# Altium PCB PCB1.PcbDoc
Units mil, origin at the board's own origin, x right, y up, seen from the top; angles counter-clockwise.
Board outline 1735 x 2560 mil, 2 copper layers (Top Layer, Bottom Layer); 17 components, 8 nets, 44 pads, 0 vias.
Unrouted connection lines stored in the file: 1.
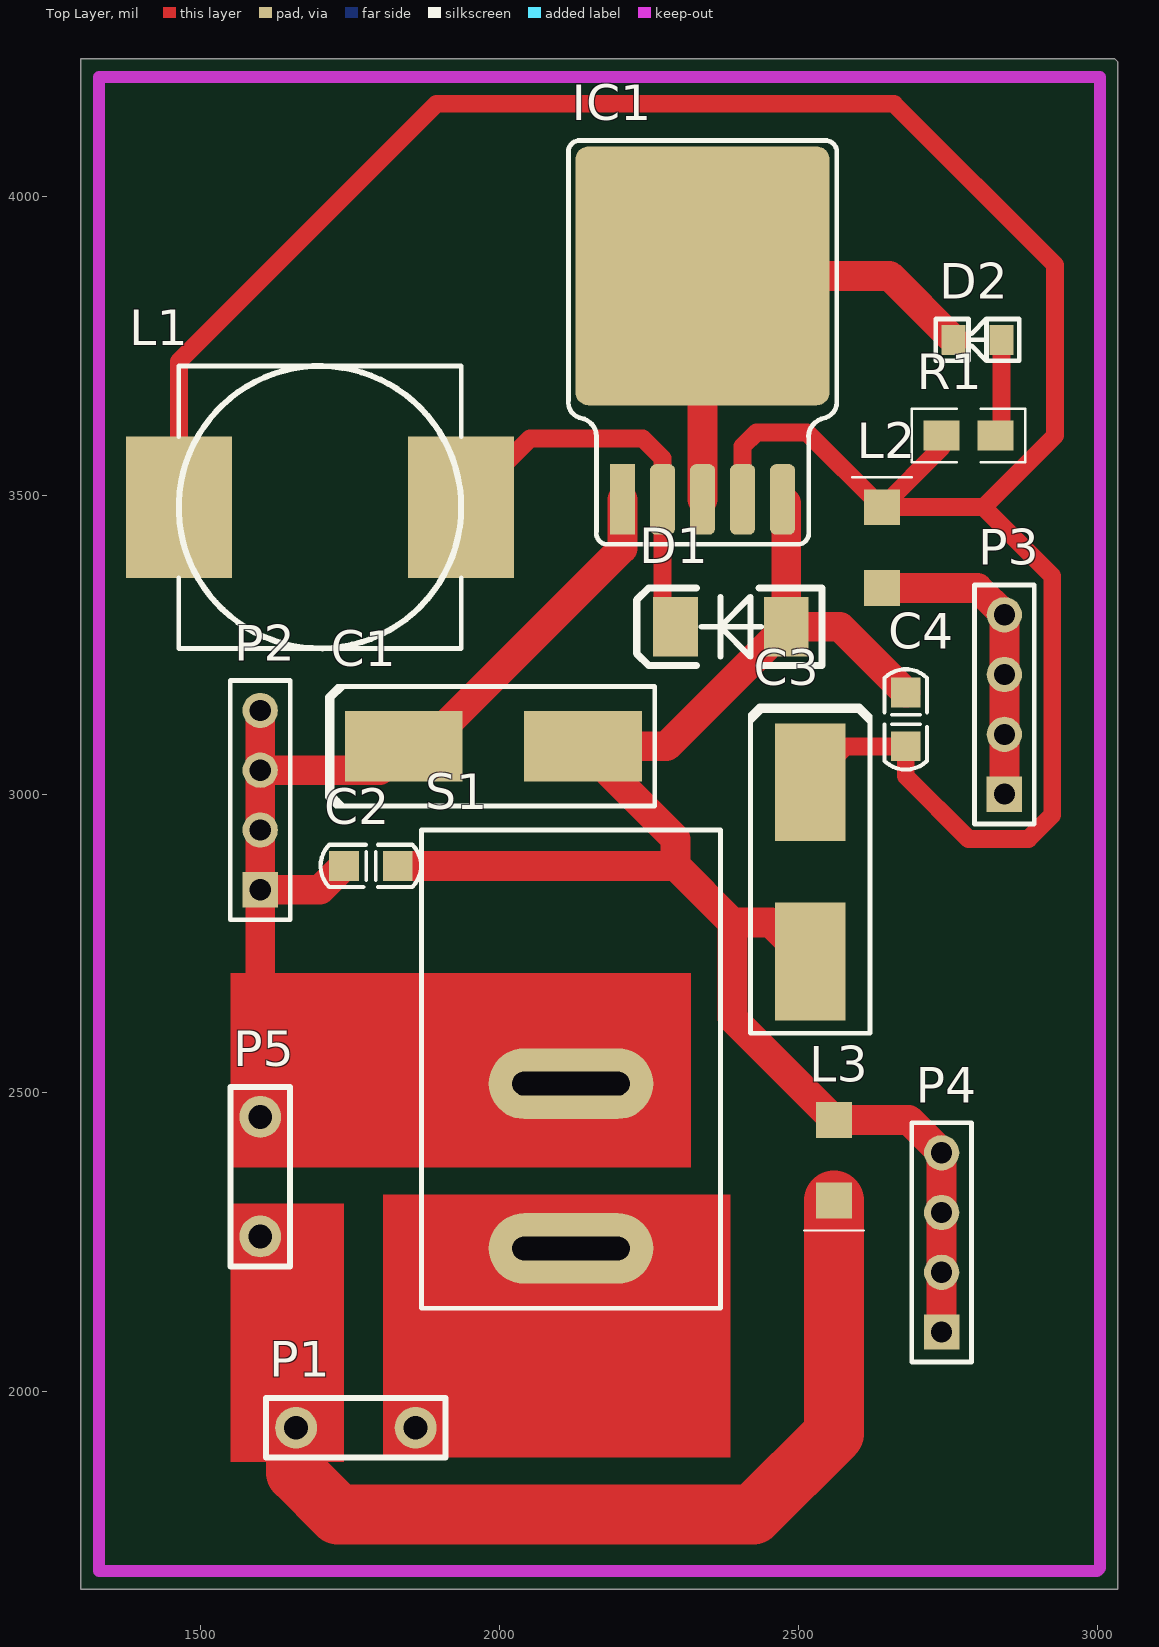
[diagram p0: Top Layer view]
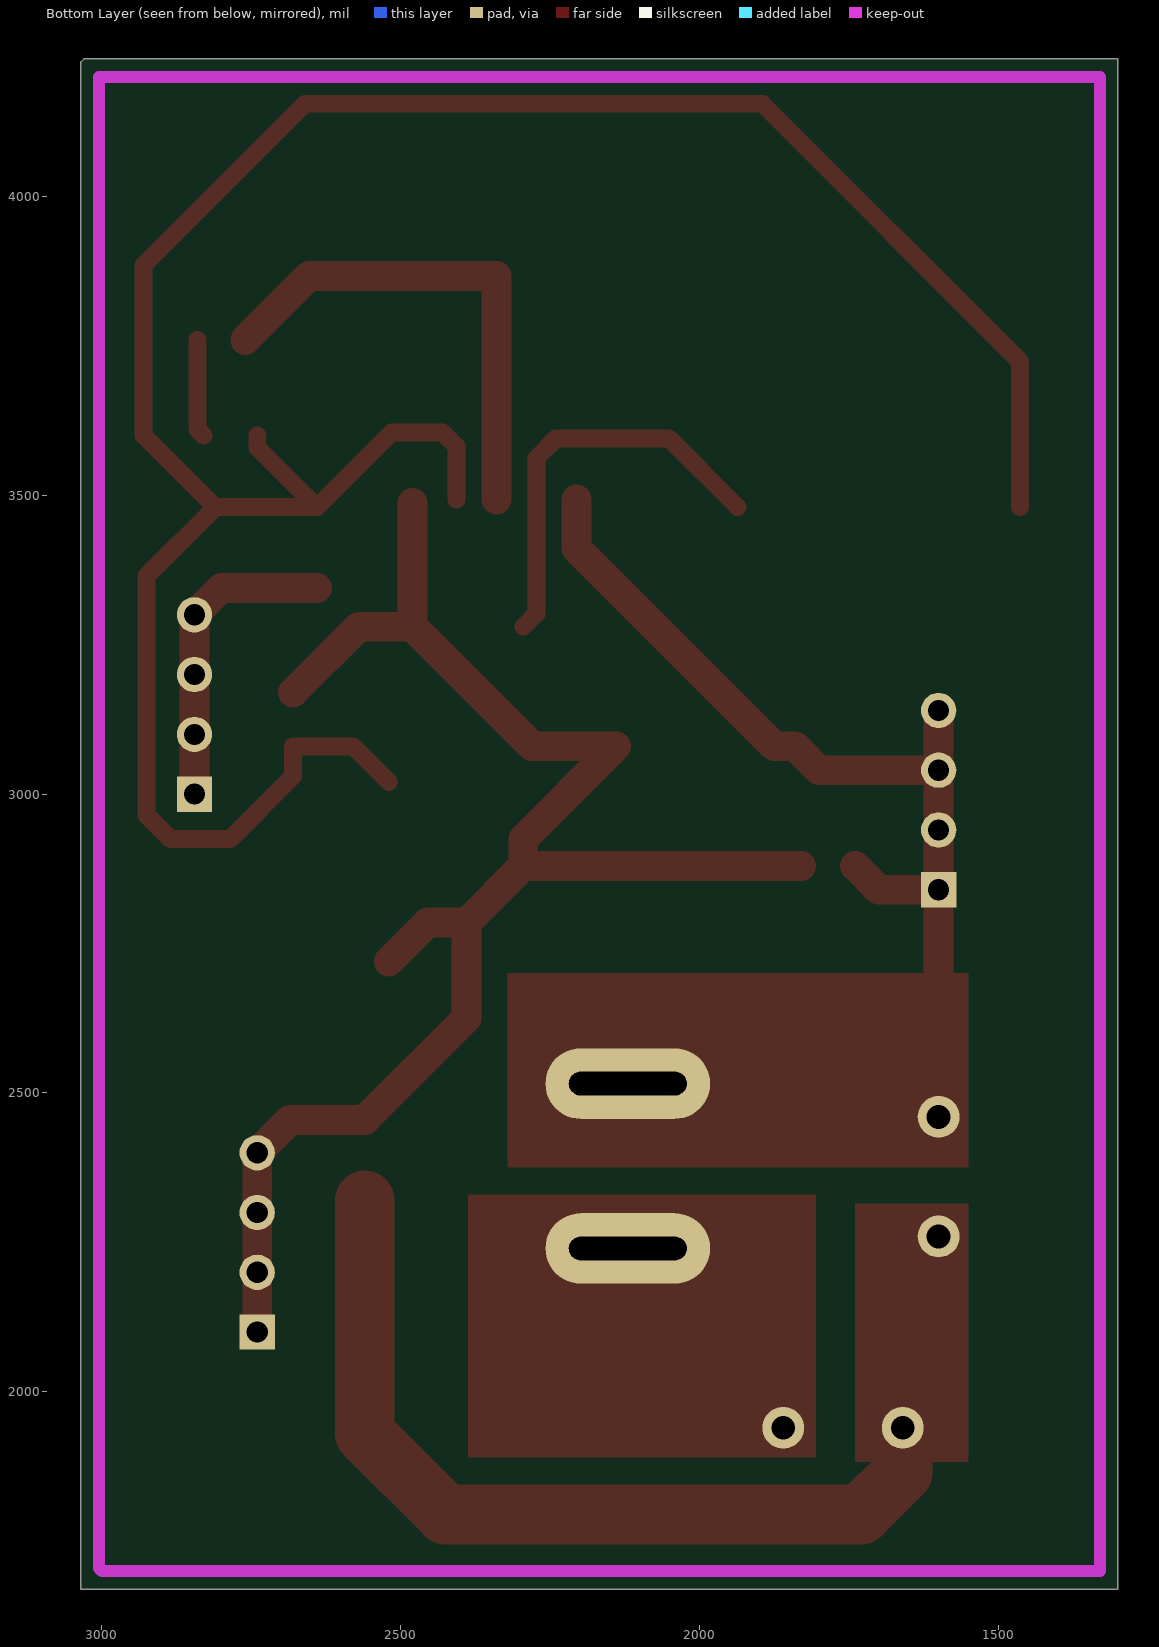
[diagram p1: Bottom Layer view, seen from below]

## Layer stack, top to bottom
Top Layer: signal copper 1.4
Dielectric: dielectric 12.6, FR-4, Dk 4.8
Bottom Layer: signal copper 1.4

## Board outline
1300,4230 1300,1670 3035,1670 3035,4225 3030,4230

## Design rules (kind name [scope] priority, off if disabled: settings)
Clearance [All] p1: gap=10
ComponentClearance [All] p1: gap=10 collisioncheckmode=3 verticalgap=10
PolygonConnect [All] p1: connectstyle=Relief reliefconductorwidth=10 reliefentries=4 polygonreliefangle="90 Angle"
RoutingVias [All] p1: holewidth=28 width=50 viastyle="Through Hole" minholewidth=28 minwidth=50 maxholewidth=28 maxwidth=50
SolderMaskExpansion [All] p1: expansion=4
TestPointUsage [All] p1: valid=0 allowmultiple=FALSE
Testpoint [All] p1: side=15 testpointundercomponent=TRUE minsize=40 maxsize=100 preferedsize=60 minholesize=0 maxholesize=40 preferedholesize=32 testpointgrid=1 style=1023 order=0123456789
Width [All] p1: maxlimit=100 minlimit=20 preferedwidth=30
18 further rules are at their usual default settings.

## Components (designator, comment, footprint, x,y, rotation, side; value= is the part's Value field where it differs from the comment)
C1 "470" ccc 1840,3080 r0 top
C2 "" C0805 1740,2880 r0 top
C3 "470" ccc 2520,3020 r270 top
C4 "" C0805 2680,3080 r90 top
D1 "D Zener" D1810 2480,3280 r180 top
D2 "LED2" D0805 2840,3760 r180 top
IC1 "LM2596-05" TO-263-5 2340,3680 r0 top
L1 "Inductor" L-12*12MM-S 1700,3480 r180 top
L2 "Inductor" L1206 2640,3480 r270 top
L3 "Inductor" L1206 2560,2320 r90 top
P1 "Header 2" SIP2-1 1860,1940 r180 top
P2 "Header 4" HDR1X4 1600,2840 r90 top
P3 "Header 4" HDR1X4 2845,3000 r90 top
P4 "Header 4" HDR1X4 2740,2100 r90 top
P5 "Header 2" SIP2-1 1600,2460 r270 top
R1 "Res2" R0805 2740,3600 r0 top
S1 "SW-SPST" PCBComponent_1 2120,2240 r90 top

## Footprints (in the part's own frame and the unit in brackets; to place one, negate y for a bottom-side part, rotate by r counter-clockwise, add the part's x,y. Pads: shape width x height; smd on the part's side, far side on the other; paste and mask are expansions set on the pad)
C0805 [mil]
  rect 50x50 smd: 1(0,0) 2(90,0)
  silkscreen extent -39,-36 129,36, body extent 6,-24 85,23, height 47
ccc [mm]
  rect 5x3 smd: 1(0,0) 2(7.62,0)
  silkscreen extent -3.25,-2.54 10.67,2.54
D0805 [mil]
  rect 40x50 smd: 1(0,0) 2(80,0)
  silkscreen extent -30,-35 110,35, body extent 0,-17 81,19, height 33
D1810 [mil]
  rect 75x100 smd: 1(0,0) 2(185,0)
  silkscreen extent -60,-65 250,65, body extent -18,-76 202,78, height 98
HDR1X4 [mm] "Connector; Header; 4 Position"
  rect 1.5x1.5 hole 0.9: 1(0,0)
  round 1.5 hole 0.9: 2(2.54,0) 3(5.08,0) 4(7.62,0)
  silkscreen extent -1.27,-1.27 8.89,1.27
L1206 [mil]
  rect 60x60 smd: 1(0,0) 2(135,0)
  silkscreen extent -50,-50 -50,50, body extent 5,-32 131,31, height 43
L-12*12MM-S [mm]
  rect 4.5x6 smd: 1(-6,0) 2(6,0)
  silkscreen extent -6,-6 6,6, body extent -6.05,-5.94 5.95,6.06, height 8
PCBComponent_1 [mm]
  oval 3x7 hole 1 slot 5 at 90 deg: 1(0,0) 2(7,0)
  silkscreen extent -2.54,-6.35 17.78,6.35
R0805 [mil]
  rect 60x50 smd: 1(0,0) 2(90,0)
  silkscreen extent -50,-45 140,45, body extent 6,-25 85,25, height 22
SIP2-1 [mil]
  round 70 hole 40: 1(0,0) 2(200,0)
  silkscreen extent -50,-50 250,50
TO-263-5 [mm]
  rect 1.07x3 smd: 1(-3.4,-4.75)
  rrect50% 1.07x3 smd: 2(-1.7,-4.75) 3(0,-4.75) 4(1.7,-4.75) 5(3.4,-4.75)
  rrect10% 10.8x11 smd: 3(0,4.75)
  silkscreen extent -5.7,-6.66 5.7,10.5, body extent -5.14,-4.8 5.09,9.55, height 4.48

## Part data
C1 C2 C3 C4: library part "Cap Pol2", "Polarized Capacitor (Axial)"
D1: "Zener Diode"
D2: "Typical RED, GREEN, YELLOW, AMBER GaAs LED"
P1 P5: "Header, 2-Pin"
P2 P3 P4: "Header, 4-Pin"
R1: "Resistor"
S1: "Single-Pole, Single-Throw Switch"

## Nets (pads, with @x,y where several pads share a name; then routed paths per layer and width w, separated by ;. In a path a pad name is that pad's centre, name@x,y a point inside that pad or via, vN(x,y) a via of type N, cw(c..) or ccw(c..) an arc to the next point about the centre after c; other vN are vias at no path point)
5V: L2.2 P3.1 P3.2 P3.3 P3.4 | length 523.6
  Top Layer w50: L2.2 2800,3345 P3.4 P3.1
DGND: C1.2 C2.2 C3.2 C4.2 D1.1 D2.2 IC1.3 IC1.5 L3.2 P4.1 P4.2 P4.3 P4.4 | length 3637.3
  Top Layer w50: C2.2 2295,2880 ; IC1.3@2340,3492.99 2340,3867.01 2652.99,3867.01 D2.2 ; IC1.5@2480,3486.85 D1.1 ; C3.2 2455,2785 2390,2785 ; C4.2 2570,3280 D1.1 ; P4.1 P4.4 2685,2455 L3.2 2390,2625 2390,2785 ; 2295,2880 2295,2925 C1.2 2280,3080 D1.1 ; 2295,2880 2390,2785
DVCC: C1.1 C2.1 IC1.1 P2.1 P2.2 P2.3 P2.4 P5.1 S1.2 | length 1475.4
  Top Layer w50: 1595,2665 1600,2670 P2.4 ; P2.1 1700,2840 C2.1 ; P2.3 1800,3040 C1.1 1875,3080 2206.14,3411.14 IC1.1
GND: L3.1 P1.2 P5.2 | length 1449.9
  Top Layer w100: P1.2 1660,1865 1730,1795 2425,1795 2560,1930 L3.1
NetC3_1: C3.1 C4.1 IC1.4 L1.2 L2.1 R1.1 | length 4272.5
  Top Layer w30: L1.2 1463.78,3723.78 1895,4155 2660,4155 2930,3885 2930,3600 2810,3480 ; IC1.4 2406.93,3581.93 2430,3605 2515,3605 L2.1 ; C3.1 2580,3080 C4.1 2680,3030 2785,2925 2885,2925 2925,2965 2925,3365 2810,3480 ; R1.1 2740,3580 L2.1 ; L2.1 2810,3480
NetD1_2: D1.2 IC1.2 L1.1 | length 689.2
  Top Layer w30: L1.1 2051.22,3595 2240,3595 2273.07,3561.93 2273.07,3301.93 D1.2
NetD2_1: D2.1 R1.2 | length 164.1
  Top Layer w30: R1.2 2840,3610 D2.1
VCC: P1.1 S1.1

## Keep-outs
Keep-Out Layer:
  lines w20: 1330,1700 3000,1700 3005,1705 3005,4200 1330,4200 1330,1700

## Other copper
Top Layer:
  rectangle net GND: 1550,1883 1740,2315
  rectangle net VCC: 1805,1890 2387,2330
  rectangle net DVCC: 1550,2375 2321,2701